# Allegro board M05_V1.0.brd
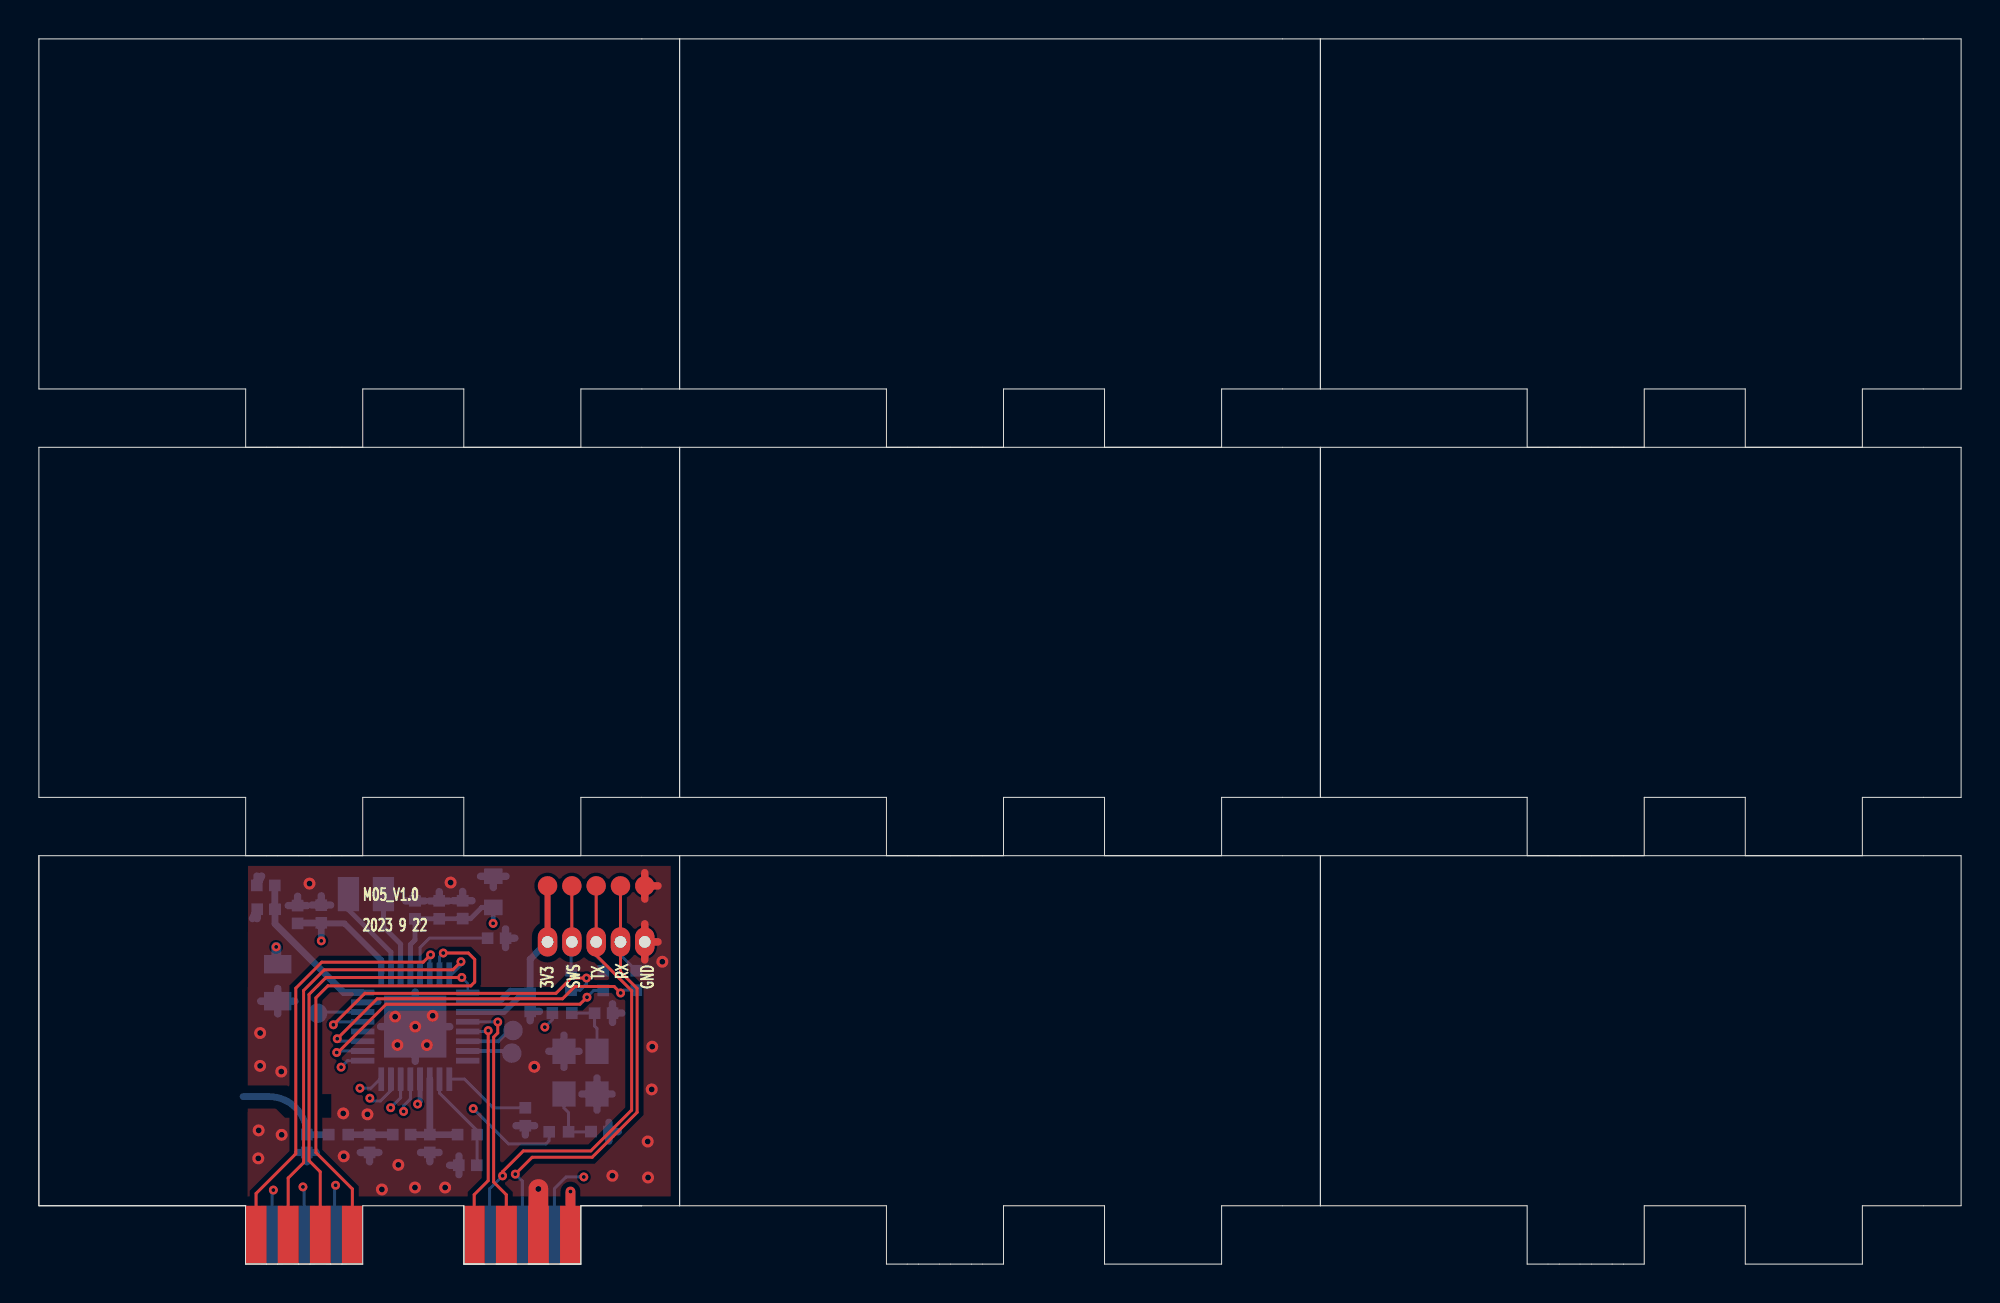
[diagram p0: board, top side]
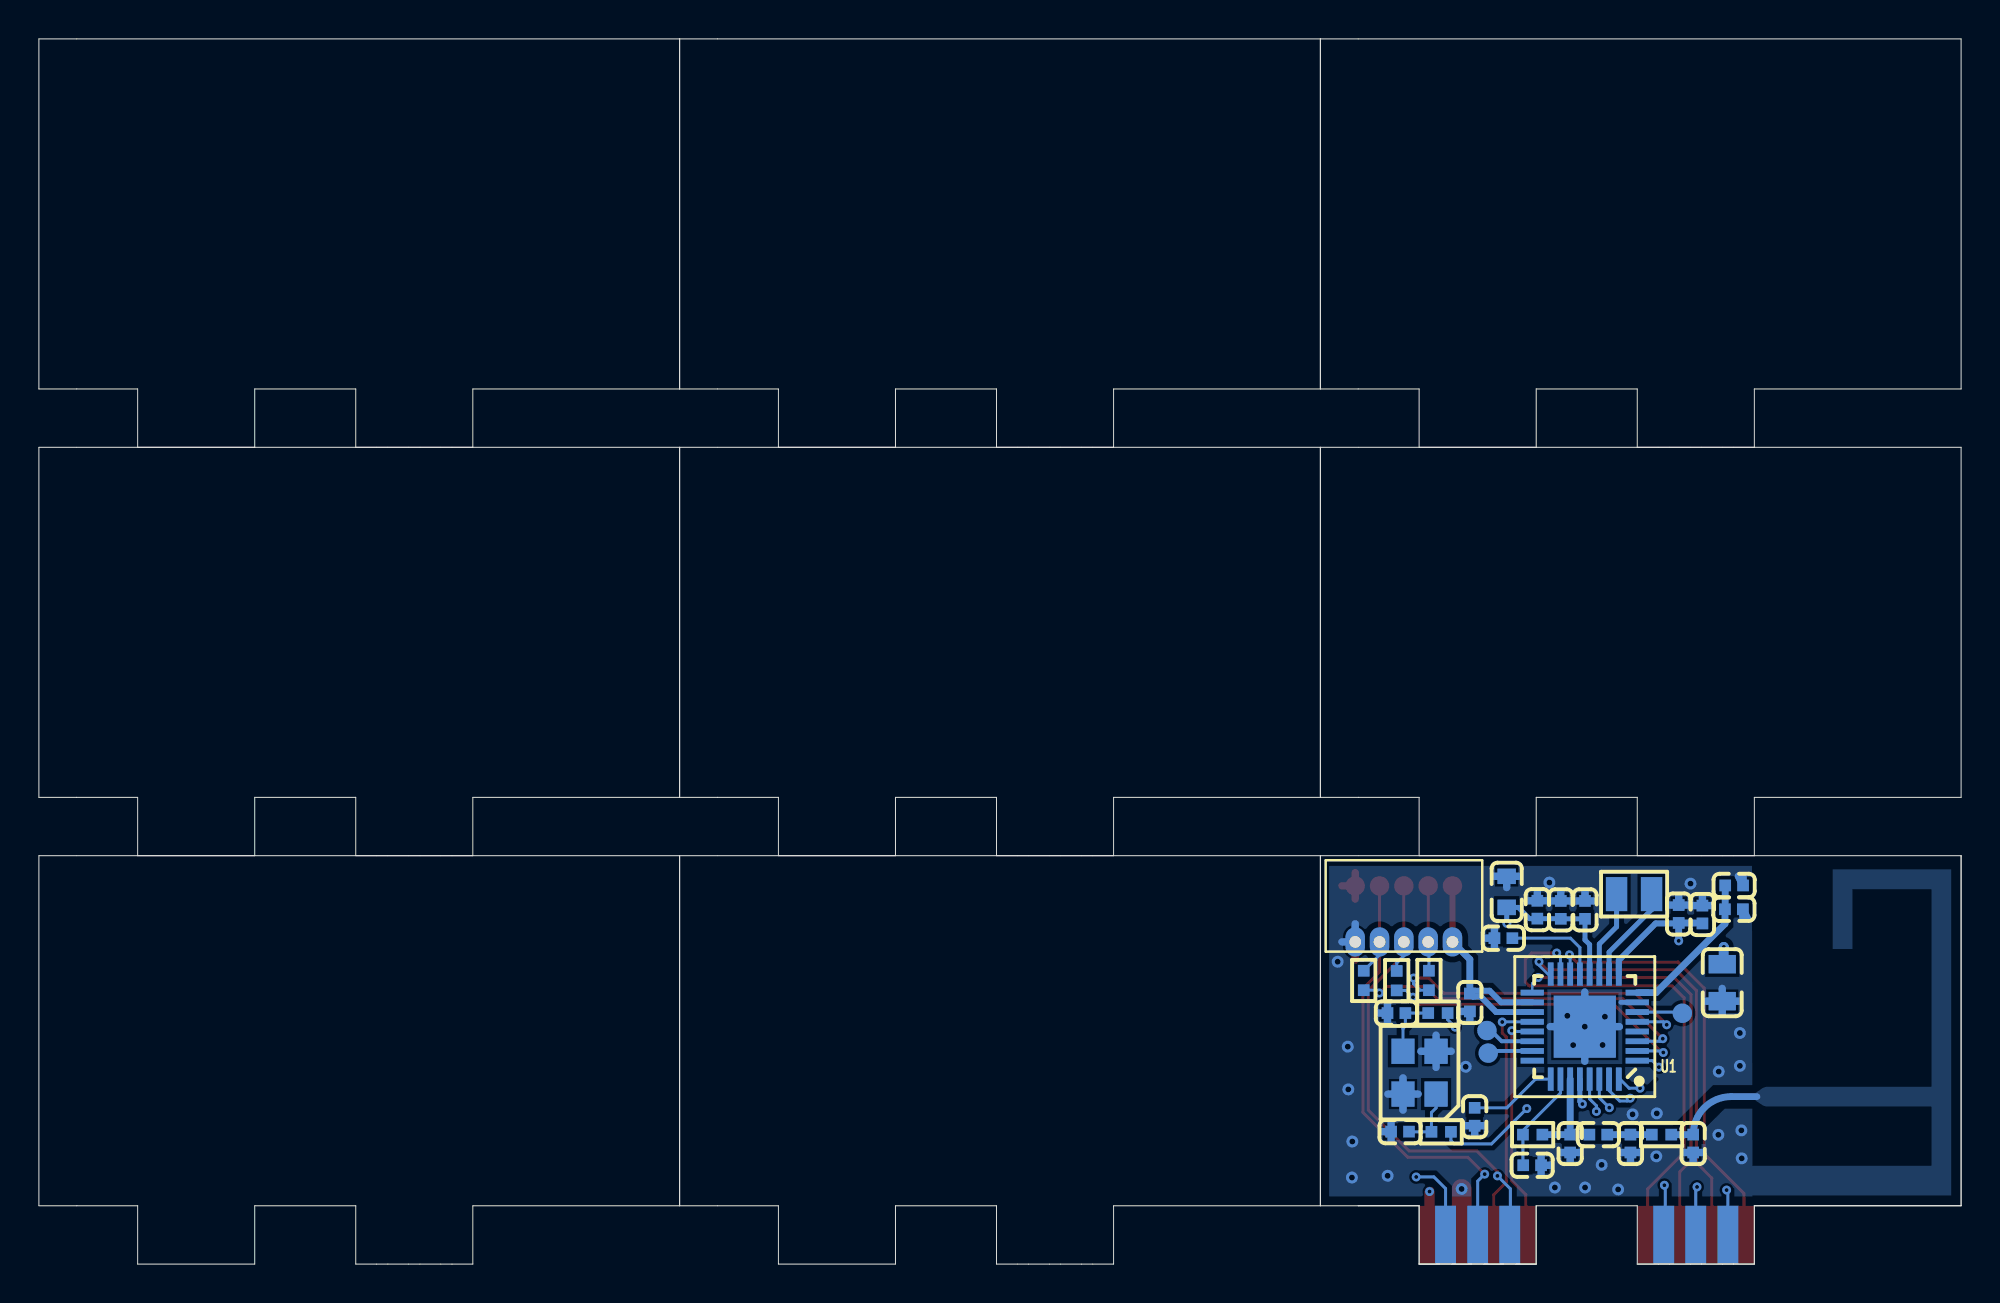
[diagram p1: board, bottom side, seen from below]

Outline 98.84 x 63 mm; copper layers: TOP, L2_ETCH, L3_GND, BOTTOM. Coordinates in mm from the lower left corner of the outline.
Outline path: 0,21 0,3 ; 0,21 32.95,21 ; 0,21 0,3 ; 0,3 10.63,3 ; 0,3 10.63,3 ; 10.63,3 10.63,0 ; 10.63,3 10.63,0 ; 10.63,0 11.7,0 ; 10.63,0 11.7,0 ; 11.7,0 12.28,0 ; 11.7,0 12.28,0 ; 12.28,0 13.35,0 ; 12.28,0 13.35,0 ; 13.35,0 13.93,0 ; 13.35,0 13.93,0 ; 13.93,0 15,0 ; 13.93,0 15,0 ; 15,0 15.58,0 ; 15,0 15.58,0 ; 15.58,0 16.65,0 ; 15.58,0 16.65,0 ; 16.65,0 16.65,3 21.85,3 ; 21.85,3 21.85,0 ; 21.85,3 21.85,0 ; 21.85,0 22.92,0 ; 21.85,0 27.87,0 ; 21.85,0 27.87,0 ; 27.87,0 26.8,0 ; 27.87,0 27.87,3 ; 27.87,0 27.87,3 ; 23.5,0 24.57,0 ; 25.15,0 26.22,0 ; 27.87,3 31,3 ; 27.87,3 31,3 ; 31,3 32.95,3 ; 32.95,63 0,63 0,45 10.63,45 10.63,42 16.65,42 16.65,45 21.85,45 21.85,42 27.87,42 27.87,45 32.95,45 ; 32.95,63 32.95,45 ; 32.95,63 65.89,63 ; 32.95,63 32.95,45 ; 32.95,42 0,42 0,24 10.63,24 10.63,21 16.65,21 16.65,24 21.85,24 21.85,21 27.87,21 27.87,24 32.95,24 ; 32.95,42 32.95,24 ; 32.95,42 65.89,42 ; 32.95,42 32.95,24 ; 32.95,21 32.95,3 ; 32.95,21 65.89,21 ; 32.95,21 32.95,3 ; 32.95,45 43.58,45 43.58,42 49.6,42 49.6,45 54.79,45 54.79,42 60.81,42 60.81,45 65.89,45 ; 32.95,24 43.58,24 43.58,21 49.6,21 49.6,24 54.79,24 54.79,21 60.81,21 60.81,24 65.89,24 ; 32.95,3 43.58,3 43.58,0 49.6,0 49.6,3 54.79,3 54.79,0 60.81,0 60.81,3 65.89,3 ; 65.89,63 65.89,45 ; 65.89,63 98.84,63 98.84,45 93.76,45 93.76,42 87.74,42 87.74,45 82.54,45 82.54,42 76.52,42 76.52,45 65.89,45 ; 65.89,63 65.89,45 ; 65.89,42 65.89,24 ; 65.89,42 98.84,42 98.84,24 93.76,24 93.76,21 87.74,21 87.74,24 82.54,24 82.54,21 76.52,21 76.52,24 65.89,24 ; 65.89,42 65.89,24 ; 65.89,21 65.89,3 ; 65.89,21 98.84,21 98.84,3 93.76,3 93.76,0 87.74,0 87.74,3 82.54,3 82.54,0 76.52,0 76.52,3 65.89,3 ; 65.89,21 65.89,3

## Placement (name value [footprint] x y rotation side)
C1  103  [C0402]  21.79 18.22 270 bottom
C2  2.2uF/10V  [C0603]  23.36 19.14 90 bottom
C3  12pF/50V  [C0402]  29.03 12.91 0 bottom
C4  12pF/50V  [C0402]  28.85 6.81 0 bottom
C5  1.2pF/NP0/50V  [C0402]  20.1 6.2 270 bottom
C6  1.8pF/NP0/50V  [C0402]  17 6.2 270 bottom
C7  1pF/NP0/50V  [C0402]  13.78 6.2 90 bottom
C8  220pF/NP0/50V  [C0402]  18.65 6.66 0 bottom
C9  18pF/NP0/50V  [C0402]  22.06 5.08 0 bottom
C10  105  [C0402]  25.01 7.58 270 bottom
C11  100pF  [C0402]  14.52 18 90 bottom
C12  104  [C0402]  13.3 17.98 90 bottom
C13  10uF/16V  [C0805]  12.28 14.47 270 bottom
C14  105  [C0402]  11.67 19.47 180 bottom
C15  103  [C0402]  11.68 18.25 0 bottom
C16  104  [C0402]  25.26 13.45 270 bottom
C17  104  [C0402]  20.58 18.21 90 bottom
C18  105  [C0402]  19.34 18.21 270 bottom
C19  105  [C0402]  23.53 16.76 180 bottom
J1  VCC3V3  [ZB_PIN1]  27.33 1.5 0 top
J2  GND  [ZB_PIN1]  25.68 1.5 0 top
J3  PC0  [ZB_PIN1]  24.03 1.5 0 top
J4  PC1  [ZB_PIN1]  22.38 1.5 0 top
J5  PB5  [ZB_PIN1]  16.12 1.5 0 top
J6  PB7  [ZB_PIN1]  14.47 1.5 0 top
J7  PB6  [ZB_PIN1]  12.82 1.5 0 top
J8  PB4  [ZB_PIN1]  11.17 1.5 0 top
J9  PD2  [ZB_PIN1]  11.99 1.5 180 bottom
J10  PD3  [ZB_PIN1]  13.64 1.5 180 bottom
J11  PD4  [ZB_PIN1]  15.29 1.5 180 bottom
J12  PD7  [ZB_PIN1]  23.21 1.5 180 bottom
J13  PA0  [ZB_PIN1]  24.86 1.5 180 bottom
J14  PA7  [ZB_PIN1]  26.51 1.5 180 bottom
J15  SIP5_PH125  [WSIP5_PH125]  28.65 16.57 0 bottom
L1  47uH  [L0806]  16.82 19.02 180 bottom
R1  0  [R0402]  26.9 12.91 180 bottom
R2  0  [R0402]  26.73 6.8 0 bottom
R3  3.3nH  [R0402]  15.4 6.66 0 bottom
R4  1.3nH  [R0402]  22.03 6.66 180 bottom
R6  10R  [R0402]  27.36 14.58 270 bottom
R7  10R  [R0402]  29.02 14.58 270 bottom
R8  10R  [R0402]  30.71 14.58 270 bottom
TP1  -  [TP1_00MM-2_20MM]  26.15 19.45 0 top
TP2  -  [TP1_00MM-2_20MM]  27.4 19.45 0 top
TP3  -  [TP1_00MM-2_20MM]  28.65 19.45 0 top
TP4  -  [TP1_00MM-2_20MM]  29.9 19.45 0 top
TP5  -  [TP1_00MM-2_20MM]  31.15 19.45 0 top
TP6  -  [TP1_00MM-2_20MM]  14.33 12.9 180 bottom
TP7  -  [TP1_00MM-2_20MM]  24.32 10.85 180 bottom
TP8  -  [TP1_00MM-2_20MM]  24.38 12.01 180 bottom
U1  TLSR8258F1KET32  [QFN32_5X5]  19.35 12.21 0 bottom
Y1  24M_3225  [Y_SMCE3225]  27.85 9.84 90 bottom

## Library data of the parts
C1-C10 C12-C19 = C: room: ZB02
C11 = C: room: PWR
J1-J14 = JAC_1P-39008278002
J15 = JH4S_PH254_TJC3-4A_10
L1 = L: room: ZB02
R1-R4 = R: room: ZB02
R6-R8 = R
TP1-TP8 = TP1_00MM-2_20MM
U1 = TLSR8258F512ET48_0: room: ZB02
Y1 = 24M_3225: room: ZB02

## Footprints (pads in the part's own frame, mm; a bottom-side part is the same pattern mirrored in y, then rotated)
C0402
  rect 0.6x0.6 smd: 1(-0.46,0) 2(0.46,0)
C0603
  rect 0.8x0.95 smd: 1(-0.8,0) 2(0.8,0)
C0805
  rect 0.95x1.4 smd: 1(-0.95,0) 2(0.95,0)
L0806
  rect 1.1x1.75 smd: 1(-0.9,0) 2(0.9,0)
QFN32_5X5
  rect 1.2x0.3 smd: 1(-2.7,1.75) 2(-2.7,1.25) 3(-2.7,0.75) 4(-2.7,0.25) 5(-2.7,-0.25) 6(-2.7,-0.75) 7(-2.7,-1.25) 8(-2.7,-1.75) 17(2.7,-1.75) 18(2.7,-1.25) 19(2.7,-0.75) 20(2.7,-0.25) 21(2.7,0.25) 22(2.7,0.75) 23(2.7,1.25) 24(2.7,1.75)
  rect 0.3x1.2 smd: 9(-1.75,-2.7) 10(-1.25,-2.7) 11(-0.75,-2.7) 12(-0.25,-2.7) 13(0.25,-2.7) 14(0.75,-2.7) 15(1.25,-2.7) 16(1.75,-2.7) 25(1.75,2.7) 26(1.25,2.7) 27(0.75,2.7) 28(0.25,2.7) 29(-0.25,2.7) 30(-0.75,2.7) 31(-1.25,2.7) 32(-1.75,2.7)
  rect 3.2x3.2 smd: 33(0,0)
R0402
  rect 0.6x0.6 smd: 1(-0.5,0) 2(0.5,0)
TP1_00MM-2_20MM
  round 1 smd: 1(0,0)
WSIP5_PH125
  oval 1x1.5 hole 0.6: 1(-2.5,0) 2(-1.25,0) 3(0,0) 4(1.25,0) 5(2.5,0)
Y_SMCE3225
  rect 1.3x1.2 smd: 1(-1.1,-0.85) 2(1.1,-0.85) 3(1.1,0.85) 4(-1.1,0.85)
ZB_PIN1
  rect 1.07x3 smd: 1(0,0)

## Nets
GND: C1.1 C2.2 C3.2 C4.2 C5.2 C6.2 C7.1 C9.1 C10.2 C11.2 C12.2 C13.2 C14.2 C15.1 C16.2 C17.2 C18.1 C19.1 J2.1 J15.5 TP5.1 U1.7(DVSS) U1.33(GND) Y1.2 Y1.4
VCC3V3: C11.1 C12.1 C13.1 C16.1 J1.1 J15.1 TP1.1 U1.9(VDD_IO) U1.18(VDD3) U1.19(VDDIO_AMS)
VDDA1V2: C1.2 C2.1 C17.1 C18.2 U1.12(VDD1V2) U1.28(AVDD1V2)
/M4_RST: C10.1 U1.25(RESETB)
I/O1: J6.1 U1.17(SDMN1/DO/URX/B[7])
I/O2: J7.1 U1.16(SDMP1/DI/URTS/B[6])
I/O3: J8.1 U1.14(SDMP0/P4/B[4])
I/O4: J9.1 U1.31(CN/I2SLR/P3/D[2])
I/O5: J10.1 U1.32(P1N/I2SSDI/7816TRX/D[3])
I/O6: J11.1 U1.1(SWM/I2SSDO/P2N/D[4])
PWM1: J3.1 U1.20(I2CSDA/P4N/URTS/PGAP0/C[0])
PWM2: J4.1 U1.21(I2CCK/P1N/P0/PGAN0/C[1])
SWS: J14.1 J15.2 R6.1 TP2.1
UART0_RX: J13.1 J15.4 R8.1 TP4.1
UART0_TX: J12.1 J15.3 R7.1 TP3.1
XTAL1: R2.1 U1.30(XC2)
XTAL2: R1.2 U1.29(XC1)
ZB_CONFIG: J5.1 U1.15(SDMN0/P5/B[5])
N76792: C6.1 C8.1 R3.2
N76796: C5.1 C8.2 R4.2 U1.27(ANT)
N76808: C9.2 R4.1 U1.26(VANT)
N76860: C7.2 R3.1
N79833: C4.1 R2.2 Y1.1
N79893: C3.1 R1.1 Y1.3
N16777615: C14.1 C15.2 U1.8(VDD1V)
N16777965: L1.2 U1.10(VDCDC_SW)
N16777970: L1.1 U1.11(VDCDC)
N16778158: C19.2 U1.13(VDD_F)
N16781038: TP6.1 U1.6(P4/UTX/ATSEL2/B[1])
N16781977: R7.2 U1.2(CK/I2SBCK/7816TRX/D[7])
N16781980: R8.2 U1.3(DMIC_DI/P0N/URX/A[0])
N16781987: R6.2 U1.5(SWS/URTS/A[7])
N1677724825: TP7.1 U1.23(P1/URX/I2CCK/32KI/PGAN1/C[3])
N1677724826: TP8.1 U1.22(P0/7816TRX/I2CSDA/32KO/PGAP1/C[)

Pads without a net: U1 4 24

## Via types
v1: diameter 0.457, hole 0.203, TOP to BOTTOM, 30 vias
v2: diameter 0.61, hole 0.305, TOP to BOTTOM, 28 vias

## Routing (per net, layer and track width the routed paths; a pad name or vN(x,y) marks a point on that pad's centre or on a via; arc(x,y) is an arc through that point)
GND: length 53.3
  TOP w0.381: TP5.1 31.83,19.45 ; TP5.1 31.15,20.13 ; TP5.1 31.15,18.77 ; J15.5 31.15,17.49 ; J15.5 31.15,15.64 ; J15.5 31.83,16.57
  TOP w1.016: v2(25.68,3.86) J2.1
  L3_GND w0.381: J15.5 31.15,17.49 ; J15.5 31.83,16.57 ; J15.5 31.15,15.64
  BOTTOM w0.254: 17.49,13.46 U1.7
  BOTTOM w0.349: 10.5,8.61 11.8,8.61
  BOTTOM w0.381: 25.01,6.64 C10.2 ; C10.2 25.49,7.12 ; C10.2 24.53,7.12 ; C4.2 29.79,6.81 ; C4.2 29.31,6.33 ; C4.2 29.31,7.29 ; 17.57,12.21 v2(19.35,12.21) ; v2(19.35,12.21) 19.35,10.43 ; v2(19.35,12.21) 19.35,13.99 ; v2(19.35,12.21) 21.13,12.21 ; 12.28,12.87 C13.2 ; C13.2 12.28,14.17 ; C13.2 11.4,13.52 ; C13.2 13.16,13.52 ; C1.1 21.79,19.16 ; C1.1 21.31,18.68 ; C1.1 22.27,18.68 ; 29.49,12.91 29.97,12.91 ; 29.49,12.91 29.49,13.39 ; 29.49,12.91 29.49,12.43 ; 16.52,5.74 C6.2 ; C6.2 17.48,5.74 ; C6.2 17,5.26 ; C18.1 19.82,18.67 ; C18.1 19.34,19.15 ; C18.1 18.86,18.67 ; C12.2 13.3,18.91 ; C12.2 12.82,18.44 ; C12.2 13.78,18.44 ; 22.71,19.94 C2.2 ; C2.2 23.36,19.36 ; C2.2 24.02,19.94 ; 25.26,12.52 C16.2 25.74,12.99 ; C5.2 20.58,5.74 ; C5.2 19.62,5.74 ; C5.2 20.1,5.26 ; 31.15,17.49 J15.5 31.83,16.57 ; 23.99,16.76 24.47,16.76 ; 23.99,16.76 23.99,17.24 ; 23.99,16.76 23.99,16.28 ; C17.2 21.06,18.67 ; C17.2 20.58,19.15 ; C17.2 20.11,18.67 ; 27,10.12 Y1.2 ; Y1.2 27,11.77 ; Y1.2 26.22,10.94 ; Y1.2 27.77,10.94 ; 11.45,19.95 C14.2 11.21,19.95 ; 11.22,17.77 C15.1 10.98,17.77 ; Y1.4 29.47,8.74 ; Y1.4 27.92,8.74 ; Y1.4 28.7,7.92 ; Y1.4 28.7,9.57 ; C9.1 21.6,5.56 ; C9.1 21.6,4.6 ; C9.1 21.12,5.08 ; C7.1 14.25,5.74 ; C7.1 13.3,5.74 ; C7.1 13.78,5.26 ; 14.04,18.46 C11.2 ; C11.2 14.52,18.94 ; C11.2 15,18.46
  vias: v2(11.3,6.88) v2(11.28,5.44) v2(11.38,11.88) v2(11.37,10.19) v2(12.46,9.9) v2(12.48,6.65) v2(13.91,19.56) v2(15.65,7.75) v2(15.67,5.54) v2(16.89,7.7) v2(17.64,3.84) v2(18.32,12.72) v2(18.43,11.27) v2(18.48,5.1) v2(19.34,3.94) v2(19.95,11.26) v2(20.25,12.77) v2(20.89,3.94) v2(21.17,19.62) v2(25.47,10.15) v2(29.49,4.54) v2(31.3,6.3) v2(31.32,4.45) v2(31.51,8.98) v2(31.54,11.18) v2(32.06,15.55)
VCC3V3: length 54.5
  TOP w0.305: TP1.1 J15.1
  TOP w0.508: v1(27.33,3.73) J1.1
  L2_ETCH w0.349: v1(14.52,16.62) 14.52,18.23
  L2_ETCH w0.508: v1(12.2,16.31) 12.21,16.32 12.21,17.29 13.15,18.23 25.65,18.23 26.15,17.72 J15.1 26.15,12.95 27.33,11.77 v1(27.33,3.73)
  BOTTOM w0.305: U1.9 17.6,15.62 15.71,17.52 14.55,17.52 C11.1 ; U1.19 23.9,12.96 24.7,13.76 25.1,13.76 25.26,13.91 ; 25.26,13.91 C16.1 ; 25.26,13.91 25.11,14.06 24.24,14.06 23.65,13.46 U1.18
  BOTTOM w0.349: J15.1 25.26,15.67 C16.1 ; C12.1 13.33,17.54 C11.1 v1(14.52,16.62)
  BOTTOM w0.508: C13.1 12.21,15.5 12.21,16.3 v1(12.2,16.31)
VDDA1V2: length 20.3
  L2_ETCH w0.254: v1(19.47,8.23) 19.47,9.67 23.34,13.54 23.34,17.51 v1(23.36,17.52)
  BOTTOM w0.254: U1.12 19.1,16.43 19.34,16.67 C18.2 C17.1 20.59,17.76 C1.2 22.19,17.76 22.77,18.34 C2.1 23.36,17.53 v1(23.36,17.52) ; v1(19.47,8.23) 19.6,8.36 U1.28
/M4_RST: length 4.5
  BOTTOM w0.152: U1.25 21.88,9.51 23.36,8.04 C10.1
I/O1: length 21.7
  TOP w0.152: J6.1 14.47,4.74 13.89,5.32 13.89,13.87 14.76,14.74 v1(21.74,14.74)
  BOTTOM w0.127: v1(21.74,14.74) 22.05,14.43 U1.17
I/O2: length 22.6
  TOP w0.152: v1(21.7,15.55) 21.29,15.13 14.67,15.13 13.61,14.07 13.61,5.22 12.82,4.42 J7.1
  BOTTOM w0.127: v1(21.7,15.55) 21.7,15.36 21.25,14.91 U1.16
I/O3: length 22.2
  TOP w0.152: v1(20.14,15.9) 19.76,15.53 14.55,15.53 13.21,14.19 13.21,5.68 11.17,3.63 J8.1
  BOTTOM w0.152: v1(20.14,15.9) 20.1,15.87 U1.14
I/O4: length 14.8
  L2_ETCH w0.152: v1(12.06,3.81) 13.46,5.21 13.46,8.73 14.42,9.69 16.78,9.69 16.99,9.48 16.99,8.55 v1(17.02,8.53)
  BOTTOM w0.152: U1.31 18.1,8.93 17.56,8.39 17.16,8.39 v1(17.02,8.53) ; J9.1 11.99,3.74 v1(12.06,3.81)
I/O5: length 11.1
  L2_ETCH w0.152: v1(13.58,3.97) 13.98,4.37 13.98,8.25 14.77,9.04 v1(16.51,9.04)
  BOTTOM w0.152: U1.32 17.54,9.51 17.07,9.04 v1(16.51,9.04) ; J10.1 13.64,3.9 v1(13.58,3.97)
I/O6: length 13.4
  L2_ETCH w0.152: v1(15.26,4.06) 16.3,4.06 17.55,5.31 17.55,9.87 17.29,10.13 v1(15.54,10.13)
  BOTTOM w0.152: U1.1 15.87,10.46 v1(15.54,10.13) ; J11.1 15.21,1.58 15.21,4.01 v1(15.26,4.06)
PWM1: length 12.9
  TOP w0.152: v1(23.59,12.45) 23.59,11.89 23.38,11.68 23.38,4.22 24.03,3.57 J3.1
  BOTTOM w0.152: v1(23.59,12.45) 23.53,12.45 23.52,12.46 U1.20
PWM2: length 11.9
  TOP w0.152: J4.1 22.38,3.57 23.1,4.29 v1(23.1,12.01)
  BOTTOM w0.152: U1.21 23.11,11.96 23.12,11.96 23.12,12.01 v1(23.1,12.01)
SWS: length 20.9
  TOP w0.152: TP2.1 J15.2
  L2_ETCH w0.152: v1(28.02,4.48) 28.02,12.02 27.4,12.64 J15.2
  BOTTOM w0.152: R6.1 27.36,16.52 J15.2 ; v1(28.02,4.48) 27.11,4.48 26.51,3.88 J14.1
UART0_RX: length 24.7
  TOP w0.152: TP4.1 J15.4 29.9,15.03 30.76,14.17 30.76,7.8 28.45,5.49 25.36,5.49 v1(24.5,4.63)
  BOTTOM w0.152: J13.1 24.86,4.27 v1(24.5,4.63) ; J15.4 29.9,15.89 R8.1
UART0_TX: length 25.4
  TOP w0.152: v1(23.84,4.54) 23.84,4.75 24.91,5.82 28.38,5.82 30.48,7.92 30.48,14.06 28.65,15.88 J15.3 TP3.1
  BOTTOM w0.152: J15.3 28.65,15.85 29.02,15.48 R7.1 ; v1(23.84,4.54) 23.18,3.87 23.18,1.53 J12.1
XTAL1: length 11.9
  L2_ETCH w0.152: v1(18.09,8.04) 18.09,7.67 18.38,7.38 21.71,7.38 v1(22.33,8)
  BOTTOM w0.152: v1(18.09,8.04) 18.6,8.56 U1.30 ; R2.1 26.23,6.35 26.07,6.18 24.15,6.18 v1(22.33,8)
XTAL2: length 13.5
  L2_ETCH w0.152: v1(26.01,12.19) 25.25,12.95 23.34,12.95 20.17,9.78 20.17,8.14 19.74,7.71 18.89,7.71 v1(18.75,7.85)
  BOTTOM w0.152: R1.2 26.4,12.57 v1(26.01,12.19) ; U1.29 19.1,8.49 18.75,8.14 v1(18.75,7.85)
ZB_CONFIG: length 25.6
  TOP w0.152: J5.1 16.12,3.86 14.24,5.74 14.24,13.69 14.86,14.31 22.21,14.31 22.41,14.51 22.41,15.67 22.08,16 v1(20.79,16)
  BOTTOM w0.152: U1.15 20.6,15.8 v1(20.79,16)
N76792: length 2.3
  BOTTOM w0.349: R3.2 15.9,6.66 C6.1 17,6.66 C8.1
N76796: length 5.3
  BOTTOM w0.349: U1.27 C5.1 ; C5.1 21.53,6.66 R4.2 ; C5.1 19.12,6.66 C8.2
N76808: length 5.2
  BOTTOM w0.152: U1.26 20.6,8.79 22.53,6.86 R4.1 22.53,5.1 C9.2
N76860: length 4.2
  BOTTOM w0.349: R3.1 13.78,6.66 C7.2 arc(13.2,8.04) 11.82,8.61
N79833: length 3.2
  BOTTOM w0.152: Y1.1 27,8.03 27.23,7.79 R2.2 28.38,6.8 C4.1
N79893: length 3.2
  BOTTOM w0.152: R1.1 28.57,12.91 C3.1 28.57,12.24 28.7,12.12 Y1.3
N16777615: length 8
  BOTTOM w0.349: U1.8 15.68,13.96 12.14,17.5 C15.2 12.13,18.26 C14.1
N16777965: length 5
  BOTTOM w0.254: U1.10 18.1,16.04 15.92,18.23 L1.2
N16777970: length 4.5
  BOTTOM w0.254: U1.11 18.6,16.46 17.72,17.34 L1.1
N16778158: length 5
  BOTTOM w0.152: C19.2 20.08,16.76 19.6,16.28 U1.13
N16781038: length 2.3
  BOTTOM w0.152: U1.6 14.4,12.96 TP6.1
N16781977: length 16.4
  TOP w0.152: v1(28.18,13.72) 27.82,13.36 17.86,13.36 15.37,10.88 v1(15.31,10.88)
  BOTTOM w0.152: R7.2 28.53,14.08 v1(28.18,13.72) ; U1.2 15.39,10.96 v1(15.31,10.88)
N16781980: length 18
  TOP w0.152: v1(15.34,11.59) 17.39,13.64 26.93,13.64 27.56,14.28 29.58,14.28 v1(29.91,13.94)
  BOTTOM w0.152: v1(15.34,11.59) 15.47,11.46 U1.3 ; R8.2 30.05,14.08 v1(29.91,13.94)
N16781987: length 16.8
  TOP w0.152: v1(28.15,14.71) 27.37,14.71 26.59,13.92 16.76,13.92 v1(15.14,12.31)
  BOTTOM w0.152: v1(28.15,14.71) 28.15,14.42 27.82,14.08 R6.2 ; v1(15.14,12.31) 15.29,12.46 U1.5
N1677724825: length 2.3
  BOTTOM w0.2: U1.23 24.2,10.96 TP7.1
N1677724826: length 2.6
  BOTTOM w0.2: U1.22 23.62,11.46 24.17,12.01 TP8.1

## Copper pours and planes (outline as drawn; the poured copper is in the pictures)
GND on TOP: 10.73,3.48 10.75,20.47 30.49,20.47 30.49,20.48 32.49,20.48 32.49,3.48 ; 6 cut-outs
GND on BOTTOM: 10.73,3.48 10.74,7.99 12.16,7.99 12.64,7.5 12.65,7.5 13.16,6.99 13.16,6.18 14.83,6.18 14.83,7.12 12.76,9.2 10.74,9.2 10.75,20.47 30.49,20.47 32.49,20.47 32.49,3.48 ; 9 cut-outs
GND on BOTTOM: 0.51,3.53 0.51,20.29 6.6,20.29 6.6,16.21 5.59,16.21 5.59,19.28 1.52,19.28 1.52,9.12 10.01,9.12 10.14,9.08 10.25,9.01 10.55,8.82 10.59,8.77 10.59,8.44 10.55,8.4 10.24,8.19 10.24,8.19 10.1,8.13 9.94,8.1 1.52,8.1 1.52,5.05 10.94,5.05 10.94,3.53
GND on L2_ETCH: 10.73,3.48 10.75,20.47 30.49,20.47 30.49,20.48 32.49,20.48 32.49,3.48 ; 2 cut-outs
GND on L3_GND: 10.73,3.48 10.75,20.47 30.49,20.47 30.49,20.48 32.49,20.48 32.49,3.48

## Text on the board
Ref Des/Silkscreen Top: 2023 9 22 | M05_V1.0 | 3V3 | SWS | TX | RX | GND
User.10: FIGURE | SIZE | 0.2032 | 0.3048 | 0.6 | DRILL CHART: TOP to BOTTOM | ALL UNITS ARE IN MILLIMETERS | PLATED | QTY | 30 | 28 | 5
